# Altium PCB interface.PcbDoc (part 1 of 2)
Units mm, origin at the board's own origin, x right, y up, seen from the top; angles counter-clockwise.
Board outline 152.4 x 101.6 mm, 4 copper layers (Top Layer 1, Top Layer, Bottom Layer, Bottom Layer 1), stack 1.483 mm thick; 90 components, 76 nets, 332 pads, 20 vias.
Unrouted connection lines stored in the file: 69.
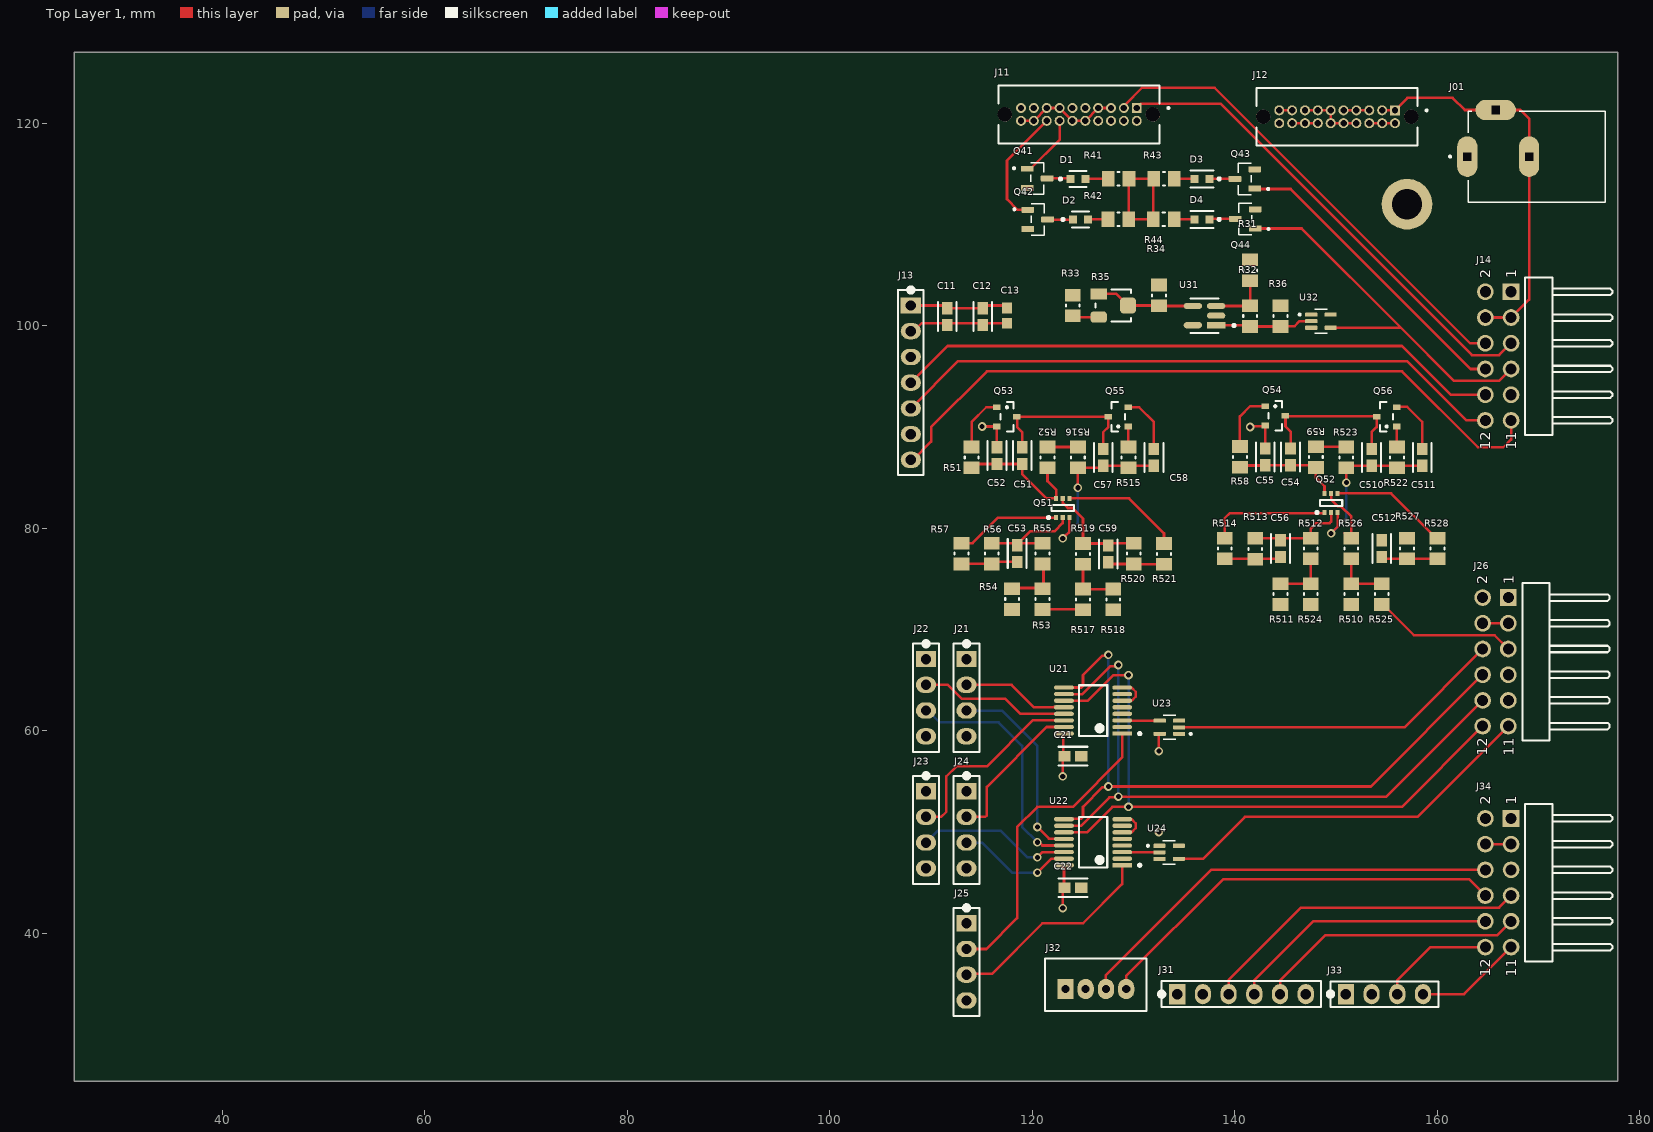
[diagram p0: Top Layer 1 view]
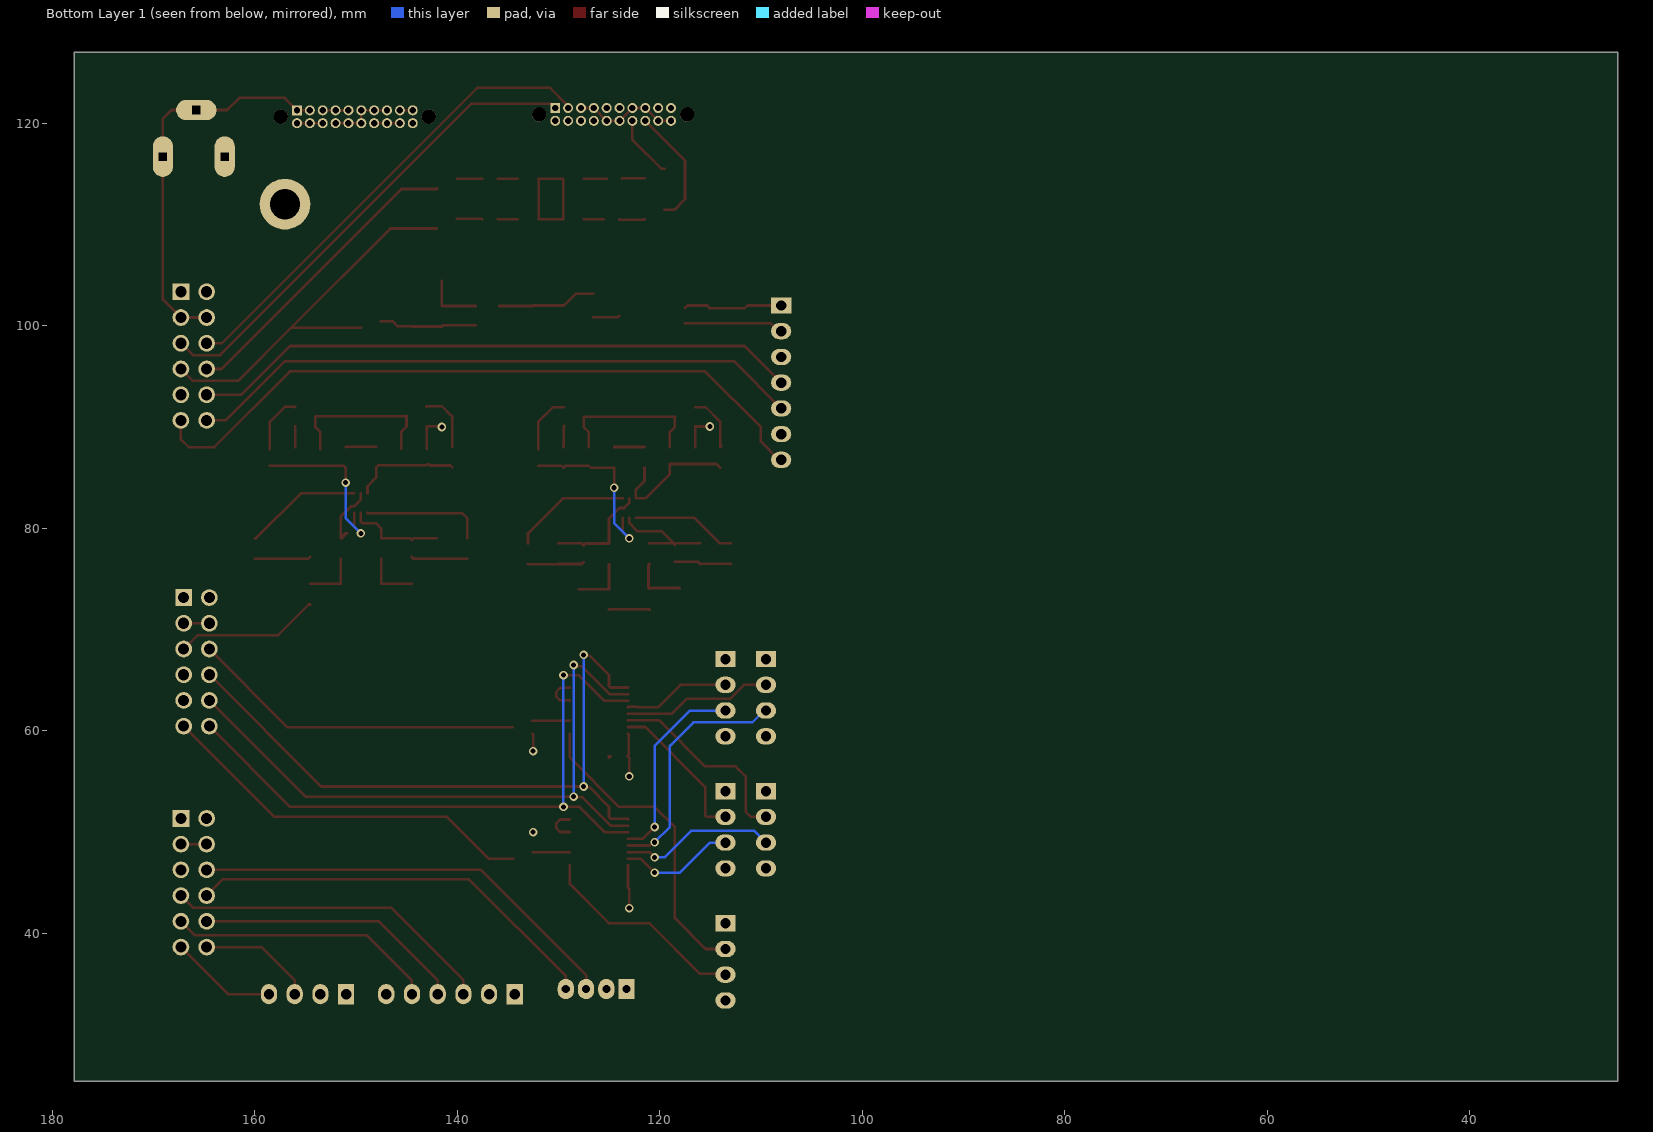
[diagram p1: Bottom Layer 1 view, seen from below]
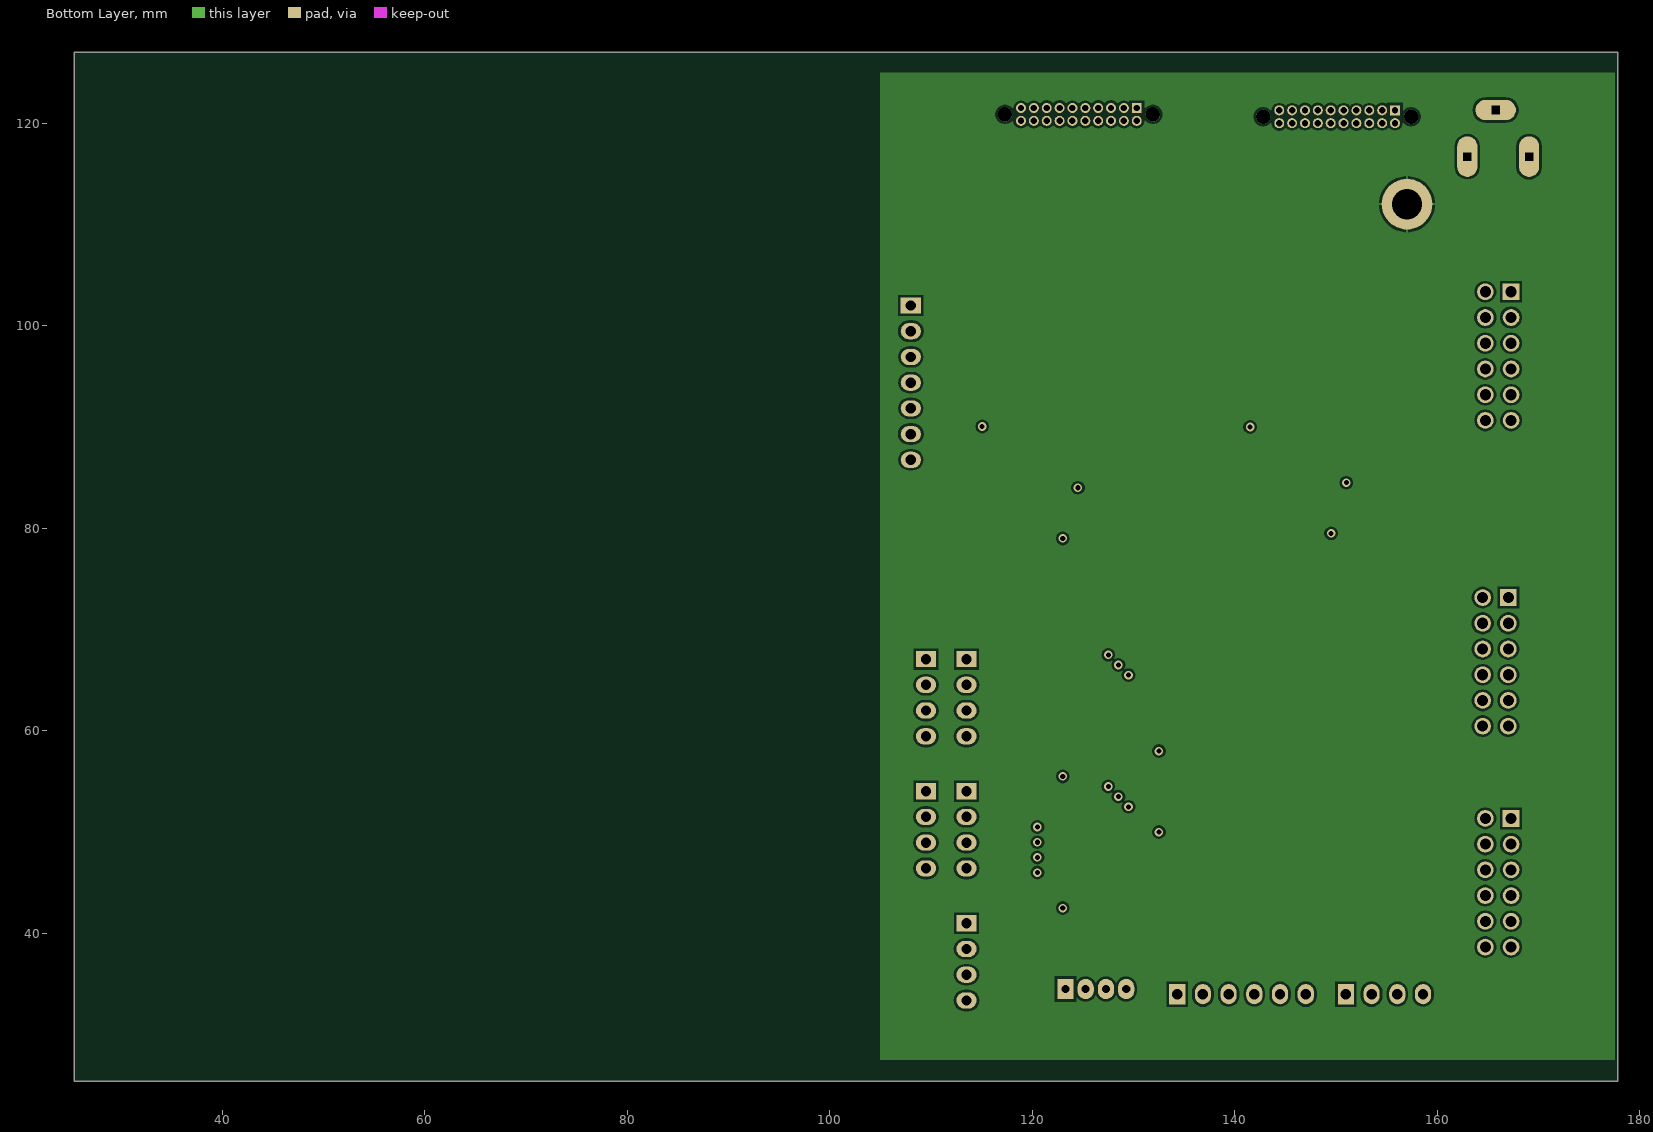
[diagram p2: Bottom Layer]

## Layer stack, top to bottom
Top Solder: solder mask 0.0102, Solder Resist, Dk 3.5
Top Layer 1: signal copper 0.035
Dielectric 2: prepreg 0.0711, PP-006, Dk 4.29
Top Layer: signal copper 0.0356
Dielectric 1: dielectric 1.2, FR-4, Dk 4.8
Bottom Layer: signal copper 0.0356
Dielectric 3: prepreg 0.0711, PP-006, Dk 4.29
Bottom Layer 1: signal copper 0.035
Bottom Solder: solder mask 0.0102, Solder Resist, Dk 3.5

## Board outline
25.4,25.4 177.8,25.4 177.8,127 25.4,127

## Design rules (kind name [scope] priority, off if disabled: settings)
Clearance [All] p1: gap=0.229 ignorepadtopadclearanceinfootprint=FALSE except(0: Arc-Hole Track-Hole SMDPad-Hole THPad-Hole Via-Hole Fill-Hole Poly-Hole Region-Hole Text-Hole)
PolygonConnect [All] p1: connectstyle=Relief reliefconductorwidth=0.254 reliefentries=4 polygonreliefangle="90 Angle" airgapwidth=0.254
RoutingVias [All] p1: holewidth=0.711 width=1.27 viastyle="Through Hole" minholewidth=0.711 minwidth=1.27 maxholewidth=0.711 maxwidth=1.27
SolderMaskExpansion [All] p1: expansion=0.102 istentingtop=FALSE
Width [All] p1: maxlimit=0.254 minlimit=0.254 preferedwidth=0.254
30 further rules are at their usual default settings.

## Components (designator, comment, footprint, x,y, rotation, side; value= is the part's Value field where it differs from the comment)
C11 "10nF" FP-C0603C-CF-IPC_A 111.599,100.9 r90 top
C12 "100nF" FP-C0603C104K5RAC3121-IPC_A 115.099,100.9 r90 top
C13 "1µF" CAPC1608X90X35NL15T15 117.5,101 r90 top
C21 "100nF" FP-C0603C104K5RAC3121-IPC_A 124,57.5 r180 top
C22 "100nF" FP-C0603C104K5RAC3121-IPC_A 124,44.5 r180 top
C51 "100nF" FP-C0603C104K5RAC3121-IPC_A 119,87.174 r90 top
C52 "100nF" FP-C0603C104K5RAC3121-IPC_A 116.5,87.174 r90 top
C53 "10nF" FP-C0603C-CF-IPC_A 118.5,77.5 r90 top
C54 "100nF" FP-C0603C104K5RAC3121-IPC_A 145.5,87.05 r90 top
C55 "100nF" FP-C0603C104K5RAC3121-IPC_A 143,87.05 r90 top
C56 "10nF" FP-C0603C-CF-IPC_A 144.5,78 r90 top
C57 "100nF" FP-C0603C104K5RAC3121-IPC_A 127,87 r90 top
C58 "100nF" FP-C0603C104K5RAC3121-IPC_A 132,87 r90 top
C59 "10nF" FP-C0603C-CF-IPC_A 127.5,77.475 r90 top
C510 "100nF" FP-C0603C104K5RAC3121-IPC_A 153.5,87 r90 top
C511 "100nF" FP-C0603C104K5RAC3121-IPC_A 158.5,87 r90 top
C512 "10nF" FP-C0603C-CF-IPC_A 154.5,78 r90 top
D1 "LTST-C193TGKT-5A" FP-LTST-C193TGKT-5A 124.5,114.5 r0 top
D2 "LTST-C193TBKT-5A" FP-LTST-C193TBKT-5A-MFG 124.75,110.5 r0 top
D3 "LTST-C190KFKT" FP-LTST-C190KFKT-MFG 136.75,114.5 r180 top
D4 "LTST-C191KRKT" FP-LTST-C191KRKT 136.75,110.5 r180 top
J01 "CON-SOCJ-2155" GRAVITECH_CON-SOCJ-2155 166,119 r180 top
J11 "Holo 32 conector" SAMTEC_TFM-110-21-S-D-A 124.595,120.865 r180 top
J12 "Holo 32 conector" SAMTEC_TFM-110-21-S-D-A 150.095,120.635 r180 top
J13 "1x7 Header" "header 1x7" 108,102 r0 top
J14 "61301221021" 61301221021 170,97 r90 top
J21 "1x4 Header" "header 1x4" 113.5,67.08 r0 top
J22 "1x4 Header" "header 1x4" 109.5,67.08 r0 top
J23 "1x4 Header" "header 1x4" 109.5,54.04 r0 top
J24 "1x4 Header" "header 1x4" 113.5,54.04 r0 top
J25 "1x4 Header" "header 1x4" 113.5,41 r0 top
J26 "61301221021" 61301221021 169.73,66.81 r90 top
J31 "1x6 Header" "header 1x6" 140.65,34 r90 top
J32 "1x4 Grove conector" FP-110990030 123.268,34.5 r90 top
J33 "1x4 Header" "header 1x4" 150.96,34 r90 top
J34 "61301221021" 61301221021 170,45 r90 top
Q41 "NXV55UNR" SOT95P230X110-3N 119.5,115.5 r0 top
Q42 "NXV55UNR" SOT95P230X110-3N 119.54,111.45 r0 top
Q43 "NXV55UNR" SOT95P230X110-3N 141.96,113.55 r180 top
Q44 "NXV55UNR" SOT95P230X110-3N 142,109.6 r180 top
Q51 "MBT3904DW1T1G" ONSC-SOT-363-6-419B-02_W_V 123,82 r90 top
Q52 "MBT3904DW1T1G" ONSC-SOT-363-6-419B-02_W_V 149.5,82.5 r90 top
Q53 "SI2304BDST1E3" FP-SI2304BDST1E3 116.5,91.95 r0 top
Q54 "SI2304BDST1E3" FP-SI2304BDST1E3 143,92.05 r0 top
Q55 "SI2304BDST1E3" FP-SI2304BDST1E3 129.468,90.05 r180 top
Q56 "SI2304BDST1E3" FP-SI2304BDST1E3 155.968,90.05 r180 top
R31 "10k" RESC2013X50X30ML20T20 141.5,105.475 r270 top
R32 "953k" RESC2013X50X30ML20T20 141.5,100.95 r270 top
R33 "680k" RESC2013X50X30ML20T20 124,102 r90 top
R34 "261k" RESC2013X50X30ML20T20 132.5,103 r270 top
R35 "3313J-2-104E" FP-3313J-2-104E 128,102 r0 top
R36 "100k" RESC2013X50X30ML20T20 144.5,100.95 r90 top
R41 "390" RESC2013X50X30ML20T20 128.525,114.5 r0 top
R42 "390" RESC2013X50X30ML20T20 128.5,110.5 r0 top
R43 "620" RESC2013X50X30ML20T20 133,114.5 r180 top
R44 "620" RESC2013X50X30ML20T20 132.975,110.5 r180 top
R51 "10k" RESC2013X50X30ML20T20 114,87 r90 top
R52 "100k" RESC2013X50X30ML20T20 121.5,87 r270 top
R53 "100k" RESC2013X50X30ML20T20 121,73 r270 top
R54 "100" RESC2013X50X30ML20T20 118,73 r90 top
R55 "10k" RESC2013X50X30ML20T20 121,77.5 r90 top
R56 "10k" RESC2013X50X30ML20T20 116,77.5 r90 top
R57 "8.2k" RESC2013X50X30ML20T20 113,77.5 r90 top
R58 "10k" RESC2013X50X30ML20T20 140.5,87.05 r90 top
R59 "100k" RESC2013X50X30ML20T20 148,87.025 r270 top
R510 "100k" RESC2013X50X30ML20T20 147.5,73.5 r270 top
R511 "100" RESC2013X50X30ML20T20 144.5,73.5 r90 top
R512 "10k" RESC2013X50X30ML20T20 147.5,78 r90 top
R513 "10k" RESC2013X50X30ML20T20 142,77.975 r90 top
R514 "8.2k" RESC2013X50X30ML20T20 139,78 r90 top
R515 "10k" RESC2013X50X30ML20T20 129.5,87 r90 top
R516 "100k" RESC2013X50X30ML20T20 124.5,87 r270 top
R517 "100k" RESC2013X50X30ML20T20 125,72.975 r270 top
R518 "100" RESC2013X50X30ML20T20 128,72.975 r90 top
R519 "10k" RESC2013X50X30ML20T20 125,77.475 r90 top
R520 "10k" RESC2013X50X30ML20T20 130,77.5 r90 top
R521 "8.2k" RESC2013X50X30ML20T20 133,77.475 r90 top
R522 "10k" RESC2013X50X30ML20T20 156,87 r90 top
R523 "100k" RESC2013X50X30ML20T20 151,87 r270 top
R524 "100k" RESC2013X50X30ML20T20 151.5,73.5 r270 top
R525 "100" RESC2013X50X30ML20T20 154.5,73.5 r90 top
R526 "10k" RESC2013X50X30ML20T20 151.5,78 r90 top
R527 "10k" RESC2013X50X30ML20T20 157,78 r90 top
R528 "8.2k" RESC2013X50X30ML20T20 160,78 r90 top
U21 "TMUX1308PWR" FP-PW0016A-IPC_A 126,62 r180 top
U22 "TMUX1308PWR" FP-PW0016A-IPC_A 126,49 r180 top
U23 "SN74LV1T04DCKRG4" SOT65P210X110-5N 133.54,60.35 r180 top
U24 "SN74LV1T04DCKRG4" SOT65P210X110-5N 133.5,48 r0 top
U31 "OPA607QDBVRQ1" FP-DBV0005A-IPC_A 137,101 r180 top
U32 "SN74LV1T04DCKRG4" SOT65P210X110-5N 148.5,100.45 r0 top

## Footprints (in the part's own frame and the unit in brackets; to place one, negate y for a bottom-side part, rotate by r counter-clockwise, add the part's x,y. Pads: shape width x height; smd on the part's side, far side on the other; paste and mask are expansions set on the pad)
61301221021 [mm] "Pin Header, pitch 2.54 mm, THT, Angled, dual row, 12p"
  rect 1.65x1.65 hole 1.1: 1(6.35,2.73)
  round 1.65 hole 1.1: 2(6.35,5.27) 3(3.81,2.73) 4(3.81,5.27) 5(1.27,2.73) 6(1.27,5.27) 7(-1.27,2.73) 8(-1.27,5.27) 9(-3.81,2.73) 10(-3.81,5.27) 11(-6.35,2.73) 12(-6.35,5.27)
  silkscreen extent -7.77,-7.27 7.77,1.35, body extent -7.62,-7.27 7.62,5.63, height 5.12
CAPC1608X90X35NL15T15 [mm] "Chip Capacitor, 2-Leads, Body 1.60x0.81mm, IPC Medium Density"
  rect 1.05x1 smd: 1(-0.75,0) 2(0.75,0)
  body extent -0.88,-0.48 0.87,0.48, height 0.9
FP-3313J-2-104E [mm]
  rect 1.6x1.1 smd: 1(-1.45,1.15)
  rrect50% 1.6x1.1 smd: 2(-1.45,-1.15)
  rrect50% 1.6x1.6 smd: 3(1.45,0)
  silkscreen extent -1.75,-1.6 1.75,1.6
FP-110990030 [mm]
  rect 2x1.6 hole 0.8: 1(0,0)
  oval 2x1.6 hole 0.8: 2(0,-2) 3(0,-4) 4(0,-6)
  silkscreen extent -2.17,-8 3,2, body extent -2.15,-8 2.95,2, height 8.11
FP-C0603C104K5RAC3121-IPC_A [mil]
  rect 47.5x41.66 smd paste+0 mask+0: 1(-32.51,0) 2(32.51,0)
  silkscreen extent -56,-37 56,37, body extent -76,-41 76,41, height 10
FP-C0603C-CF-IPC_A [mil]
  rect 47.5x41.66 smd paste+0 mask+0: 1(-32.51,0) 2(32.51,0)
  silkscreen extent -56,-37 56,37, body extent -76,-41 76,41, height 10
FP-DBV0005A-IPC_A [mm]
  rect 1.805x0.612 smd paste+0 mask+0: 1(-1.15,0.95)
  rrect100% 1.805x0.612 smd paste+0 mask+0: 2(-1.15,0) 3(-1.15,-0.95) 4(1.15,-0.95) 5(1.15,0.95)
  silkscreen extent -3.03,-1.7 1.4,1.7, body extent -2.55,-1.95 2.55,1.95, height 0.25
FP-LTST-C190KFKT-MFG [mm]
  rect 0.8x0.8 smd paste+0 mask+0: 1(-0.75,0) 2(0.75,0)
  silkscreen extent -1.83,-0.85 1.15,0.85, body extent -1.25,-0.55 1.25,0.55, height 0.25
FP-LTST-C191KRKT [mm]
  rect 0.8x0.8 smd paste+0 mask+0: 1(-0.75,0) 2(0.75,0)
  silkscreen extent -1.83,-0.85 1.15,0.85, body extent -0.8,-0.4 0.8,0.4, height 0.81
FP-LTST-C193TBKT-5A-MFG [mm]
  rect 0.8x0.8 smd paste+0 mask+0: 1(-0.75,0) 2(0.75,0)
  silkscreen extent -1.85,-0.8 0.85,0.8, body extent -1.25,-0.55 1.25,0.55, height 0.25
FP-LTST-C193TGKT-5A [mm]
  rect 0.8x0.8 smd paste+0 mask+0: 1(-0.75,0) 2(0.75,0)
  silkscreen extent -1.85,-0.8 0.85,0.8, body extent -1.25,-0.55 1.25,0.55, height 0.25
FP-PW0016A-IPC_A [mm]
  rect 1.955x0.421 smd paste+0 mask+0: 1(-2.875,2.275)
  rrect100% 1.955x0.421 smd paste+0 mask+0: 2(-2.875,1.625) 3(-2.875,0.975) 4(-2.875,0.325) 5(-2.875,-0.325) 6(-2.875,-0.975) 7(-2.875,-1.625) 8(-2.875,-2.275) 9(2.875,-2.275) 10(2.875,-1.625) 11(2.875,-0.975) 12(2.875,-0.325) 13(2.875,0.325) 14(2.875,0.975) 15(2.875,1.625) 16(2.875,2.275)
  silkscreen extent -4.73,-2.5 1.4,2.5, body extent -4.35,-3 4.35,3, height 0.25
FP-SI2304BDST1E3 [mm]
  rect 0.724x0.559 smd: 1(0,0) 2(0,-1.9) 3(1.968,-0.95)
  silkscreen extent 0.33,-2.4 1.63,0.5
GRAVITECH_CON-SOCJ-2155 [mm]
  oval 2x4 hole 0.8 square: 1(3.05,2.3) 3(-3.05,2.3)
  oval 4x2 hole 0.8 square: 2(0.25,-2.3)
  silkscreen extent -10.55,-2.2 4.85,6.8, body extent -10.55,-2.45 3.55,6.8, height 11.1
"header 1x4" [mm]
  rect 2x1.6 hole 1.02: 1(0,0)
  oval 2x1.6 hole 1.02: 2(0,-2.54) 3(0,-5.08) 4(0,-7.62)
  silkscreen extent -1.27,-9.15 1.27,1.72
"header 1x6" [mm]
  rect 2x1.6 hole 1.02: 1(0,6.35)
  oval 2x1.6 hole 1.02: 2(0,3.81) 3(0,1.27) 4(0,-1.27) 5(0,-3.81) 6(0,-6.35)
  silkscreen extent -1.28,-7.88 1.28,8.08
"header 1x7" [mm]
  rect 2x1.6 hole 1.02: 1(0,0)
  oval 2x1.6 hole 1.02: 2(0,-2.54) 3(0,-5.08) 4(0,-7.62) 5(0,-10.16) 6(0,-12.7) 7(0,-15.24)
  silkscreen extent -1.28,-16.75 1.28,1.73
ONSC-SOT-363-6-419B-02_W_V [mm] "SOT23, 6-Leads, Body 2x1.25mm, Pitch 0.65mm"
  rect 0.5x0.4 smd: 1(-0.95,0.65) 2(-0.95,0) 3(-0.95,-0.65) 4(0.95,-0.65) 5(0.95,0) 6(0.95,0.65)
  silkscreen extent -1.07,-1.1 0.3,1.52, body extent -0.63,-1 0.63,1, height 1.1
RESC2013X50X30ML20T20 [mm] "Chip Resistor, 2-Leads, Body 2.00x1.25mm, IPC Low Density"
  rect 1.25x1.55 smd: 1(-1.025,0) 2(1.025,0)
  silkscreen extent -0.1,-0.67 0.1,0.67, body extent -1.1,-0.72 1.1,0.72, height 0.5
SAMTEC_TFM-110-21-S-D-A [mm]
  rect 0.985x0.985 hole 0.635: 1(-5.715,-0.635)
  round 0.985 hole 0.635: 2(-5.715,0.635) 3(-4.445,-0.635) 4(-4.445,0.635) 5(-3.175,-0.635) 6(-3.175,0.635) 7(-1.905,-0.635) 8(-1.905,0.635) 9(-0.635,-0.635) 10(-0.635,0.635) 11(0.635,-0.635) 12(0.635,0.635) 13(1.905,-0.635) 14(1.905,0.635) 15(3.175,-0.635) 16(3.175,0.635) 17(4.445,-0.635) 18(4.445,0.635) 19(5.715,-0.635) 20(5.715,0.635)
  round 1.42 hole 1.42 unplated: ""(-7.305,0) ""(7.305,0)
  silkscreen extent -8.94,-2.86 7.94,2.86
SOT65P210X110-5N [mm]
  rrect25% 1.19x0.4 smd: 1(-0.96,0.65) 2(-0.96,0) 3(-0.96,-0.65) 4(0.96,-0.65) 5(0.96,0.65)
  silkscreen extent -2.2,-1.17 0.63,1.17, body extent -1.05,-1 1.05,1, height 1.1
SOT95P230X110-3N [mm]
  rrect25% 1.26x0.59 smd: 1(0,0) 2(0,-1.9) 3(1.96,-0.95)
  silkscreen extent -1.42,-2.51 1.63,0.61, body extent -0.17,-2.4 2.13,0.5, height 1.11

## Part data
C11 C53 C56 C59 C512: library part C0603C103K5RACTU, "CAP CER 10000PF 50V X7R 0603", Case Code (Imperial)=0603, Case Code (Metric)=1608, Dielectric=X7R, Dielectric Material=Ceramic, Manufacturer=KEMET, Max Operating Temperature=125°C, Min Operating Temperature=-55°C, Package Quantity=4000, Tolerance=10%, Voltage=50V, Capacitance=10nF, Case/Package=0603, Category="Ceramic Capacitors", ComponentLink1Description=https://datasheet.ciiva.com/7823/1732718-7823585.pdf?src-supplier=Element14, ComponentLink1URL=https://datasheet.ciiva.com/7823/1732718-7823585.pdf?src-supplier=Element14, ComponentLink2Description=https://datasheet.ciiva.com/5904/kem-c1002-x7r-smd-5904645.pdf?src-supplier=Farnell, ComponentLink2URL=https://datasheet.ciiva.com/5904/kem-c1002-x7r-smd-5904645.pdf?src-supplier=Farnell, ComponentLink3Description=https://datasheet.ciiva.com/7823/kem-c1002-x7r-smd-7823976.pdf?src-supplier=Element14, ComponentLink3URL=https://datasheet.ciiva.com/7823/kem-c1002-x7r-smd-7823976.pdf?src-supplier=Element14, ComponentLink4Description=https://datasheet.ciiva.com/7823/1918693-7823978.pdf?src-supplier=Element14, ComponentLink4URL=https://datasheet.ciiva.com/7823/1918693-7823978.pdf?src-supplier=Element14, ComponentLink5Description=https://datasheet.ciiva.com/28645/1851736-28645598.pdf?src-supplier=Element14, ComponentLink5URL=https://datasheet.ciiva.com/28645/1851736-28645598.pdf?src-supplier=Element14, ComponentLink6Description=https://datasheet.ciiva.com/7823/kem-c1002-x7r-smd-7823977.pdf?src-supplier=Element14, ComponentLink6URL=https://datasheet.ciiva.com/7823/kem-c1002-x7r-smd-7823977.pdf?src-supplier=Element14, ComponentLink7Description=https://datasheet.ciiva.com/14585/70095383-14585450.pdf?src-supplier=Allied+Electronics, ComponentLink7URL=https://datasheet.ciiva.com/14585/70095383-14585450.pdf?src-supplier=Allied+Electronics, ComponentLink8Description=https://datasheet.ciiva.com/5416/kem-c1002-x7r-smd-5416028.pdf?src-supplier=Mouser, ComponentLink8URL=https://datasheet.ciiva.com/5416/kem-c1002-x7r-smd-5416028.pdf?src-supplier=Mouser, ComponentLink9Description=https://datasheet.ciiva.com/39122/kem-c1002-x7r-smd-39122903.pdf?src-supplier=Onlinecomponents.com, ComponentLink9URL=https://datasheet.ciiva.com/39122/kem-c1002-x7r-smd-39122903.pdf?src-supplier=Onlinecomponents.com, ComponentLink10Description=https://datasheet.ciiva.com/18192/getdatasheetpartid-308803-18192662.pdf?src-supplier=Verical, ComponentLink10URL=https://datasheet.ciiva.com/18192/getdatasheetpartid-308803-18192662.pdf?src-supplier=Verical, ComponentLink11Description=https://datasheet.ciiva.com/18101/getdatasheetpartid-58468-18101898.pdf?src-supplier=Verical, ComponentLink11URL=https://datasheet.ciiva.com/18101/getdatasheetpartid-58468-18101898.pdf?src-supplier=Verical, Construction=Flat, Contact Plating=Tin,Matte, Depth=0.8mm, Dissipation Factor=2.5%, Height=0.8mm, Lead Pitch=0.7mm, Length=1.6mm, Manufacturer Part Number=C0603C103K5RACTU, Mount="Surface Mount,PCB", Number of Pins=2, Packaging="Tape and Reel", Pricing 1="1=0,16000, 10=0,07400, 50=0,07400, 100=0,03300, 500=0,02400, 1000=0,01900, 2000=0,01700, 4000=0,01500, 8000=0,01300, 10000=0,01300 (USD)", Radiation Hardening=No, REACH SVHC="No SVHC", RoHS=Yes, RoHS Compliant=Yes, Series=C0603C, Stock 1=1844699, Supplier 1=Mouser, Termination=SMD/SMT, Thickness=0.034inch, Voltage Rating=50V, Voltage Rating (DC)=50V, Width=0.8mm
C12 C21 C22 C51 C52 C54 C55 C57 C58 C510 C511: library part C0603C104K5RAC3121, "Cap Ceramic 0.1uF 50V X7R 10% Pad SMD 0603 125°C T/R", Case/Package=0603, Manufacturer=KEMET, Category="Ceramic Capacitors", Manufacturer Part Number=C0603C104K5RAC3121, Pricing 1="1=0,13000, 10=0,09200, 50=0,09200, 100=0,04300, 1000=0,02500, 10000=0,01900 (USD)", RoHS=Yes, RoHS Compliant=Yes, Stock 1=3306727, Supplier 1=Mouser
C13: library part C0603C105K4RACTU, "Cap Ceramic 1uF 16V X7R 10% SMD 0603 125°C Paper T/R", Capacitance=1uF, Case Code (Imperial)=0603, Case Code (Metric)=1608, Dielectric=X7R, Dielectric Material=Ceramic, Manufacturer=KEMET, Max Operating Temperature=125°C, Min Operating Temperature=-55°C, Package Quantity=4000, Tolerance=10%, Voltage=16V, Case/Package=0603, Category="Ceramic Capacitors", ComponentLink1Description=https://datasheet.ciiva.com/7823/kem-c1002-x7r-smd-7823997.pdf?src-supplier=Element14, ComponentLink1URL=https://datasheet.ciiva.com/7823/kem-c1002-x7r-smd-7823997.pdf?src-supplier=Element14, ComponentLink2Description=https://datasheet.ciiva.com/22749/kem-c1002-x7r-smd-22749721.pdf?src-supplier=Element14, ComponentLink2URL=https://datasheet.ciiva.com/22749/kem-c1002-x7r-smd-22749721.pdf?src-supplier=Element14, ComponentLink3Description=https://datasheet.ciiva.com/5419/kem-c1002-x7r-smd-5419750.pdf?src-supplier=Mouser, ComponentLink3URL=https://datasheet.ciiva.com/5419/kem-c1002-x7r-smd-5419750.pdf?src-supplier=Mouser, ComponentLink4Description=https://datasheet.ciiva.com/18192/getdatasheetpartid-385479-18192732.pdf?src-supplier=Verical, ComponentLink4URL=https://datasheet.ciiva.com/18192/getdatasheetpartid-385479-18192732.pdf?src-supplier=Verical, Construction=Flat, Contact Plating=Tin,Matte, Depth=0.8mm, Dissipation Factor=3.5%, Height=0.8mm, Length=1.6mm, Manufacturer Part Number=C0603C105K4RACTU, Mount="Surface Mount,PCB", Number of Pins=2, Packaging="Tape and Reel", Pricing 1="1=0,17000, 10=0,08000, 50=0,08000, 100=0,03600, 500=0,02600, 1000=0,02000, 2000=0,01900, 4000=0,01600, 8000=0,01400, 10000=0,01400 (USD)", Radiation Hardening=No, REACH SVHC="No SVHC", RoHS=Yes, RoHS Compliant=Yes, Series=C0603C, Stock 1=3280807, Supplier 1=Mouser, Termination=SMD/SMT, Thickness=0.034inch, Voltage Rating=16V, Voltage Rating (DC)=16V, Width=0.031inch
D1: "0603(H=0.35mm) 绿色 λD=520nm~535nm VR=5V VF=2.5V~3.1V IF=5mA PD=76mW", Case Code (Imperial)=0603, Case Code (Metric)=1608, Color=Green, Forward Current=5mA, Forward Voltage=3.1V, Lens Color=Colorless, Manufacturer="Vishay Lite-On", Max Operating Temperature=80°C, Min Operating Temperature=-20°C, Package Quantity=3000, Power Dissipation=76mW, Reverse Voltage=5V, Supplier Part Number 1=859-LTSTC193TGKT5A, Case/Package=0603, Category=LEDs, ComponentLink1Description=https://datasheet.ciiva.com/2111/ltst-c193tgkt-5a-2111818.pdf?src-supplier=Digi-Key, ComponentLink1URL=https://datasheet.ciiva.com/2111/ltst-c193tgkt-5a-2111818.pdf?src-supplier=Digi-Key, ComponentLink2Description=https://datasheet.ciiva.com/11775/0900766b80dc0555-11775617.pdf?src-supplier=RSComponents, ComponentLink2URL=https://datasheet.ciiva.com/11775/0900766b80dc0555-11775617.pdf?src-supplier=RSComponents, ComponentLink3Description=https://datasheet.ciiva.com/4689/lite-on-ltst-c193tgkt-5a-187259-4689610.pdf?src-supplier=Mouser, ComponentLink3URL=https://datasheet.ciiva.com/4689/lite-on-ltst-c193tgkt-5a-187259-4689610.pdf?src-supplier=Mouser, ComponentLink4Description=https://datasheet.ciiva.com/2111/p-100-ltst-c193tgkt-5a-2111819.pdf?src-supplier=Digi-Key, ComponentLink4URL=https://datasheet.ciiva.com/2111/p-100-ltst-c193tgkt-5a-2111819.pdf?src-supplier=Digi-Key, ComponentLink5Description=https://datasheet.ciiva.com/2111/p-100-ltst-c193tgkt-5a-2111820.pdf?src-supplier=Digi-Key, ComponentLink5URL=https://datasheet.ciiva.com/2111/p-100-ltst-c193tgkt-5a-2111820.pdf?src-supplier=Digi-Key, Depth=0.8mm, Dominant Wavelength=535nm, Height=0.35mm, Illumination Color=Green, Lead Free="Lead Free", Length=1.6mm, Lens Style=Diffused,Colorless,Rectangular, Lens Transparency=Clear, Luminous Intensity=280mcd, Manufacturer Part Number=LTST-C193TGKT-5A, Mount="Surface Mount", Number of Elements=1, Number of LEDs=1, Number of Pins=2, Packaging="Tape and Reel", Pricing 1="1=0,44000, 10=0,27500, 50=0,27500, 100=0,15800, 1000=0,12400, 5000=0,11300, 10000=0,09600, 25000=0,09200, 50000=0,08900 (USD)", Radiation Hardening=No, RoHS=Yes, RoHS Compliant=Yes, Series=-, Stock 1=78292, Supplier 1=Mouser, Test Current=5mA, Viewing Angle=130°, Width=0.8mm
D2: "0603(H=0.35mm) 蓝色 λD=465nm~475nm VR=5V VF=2.65V~3.05V IF=5mA PD=76mW", Case Code (Imperial)=0603, Case Code (Metric)=1608, Color=Blue, Forward Current=20mA, Forward Voltage=2.8V, Lens Color=Colorless, Manufacturer="Vishay Lite-On", Max Operating Temperature=80°C, Min Operating Temperature=-20°C, Package Quantity=1, Power Dissipation=76mW, Reverse Voltage=5V, Supplier Part Number 1=859-LTSTC193TBKT5A, Test Current=5mA, Case/Package=0603, Category=LEDs, ComponentLink1Description=https://datasheet.ciiva.com/2111/ltst-c193tbkt-5a-2111219.pdf?src-supplier=Digi-Key, ComponentLink1URL=https://datasheet.ciiva.com/2111/ltst-c193tbkt-5a-2111219.pdf?src-supplier=Digi-Key, ComponentLink2Description=https://datasheet.ciiva.com/11773/0900766b80dc0554-11773880.pdf?src-supplier=RSComponents, ComponentLink2URL=https://datasheet.ciiva.com/11773/0900766b80dc0554-11773880.pdf?src-supplier=RSComponents, ComponentLink3Description=https://datasheet.ciiva.com/4688/lite-on-ltst-c193tbkt-5a-187386-4688832.pdf?src-supplier=Mouser, ComponentLink3URL=https://datasheet.ciiva.com/4688/lite-on-ltst-c193tbkt-5a-187386-4688832.pdf?src-supplier=Mouser, ComponentLink4Description=https://datasheet.ciiva.com/16210/ltst-c193tbkt-5a-16210824.pdf?src-supplier=Future+Electronics, ComponentLink4URL=https://datasheet.ciiva.com/16210/ltst-c193tbkt-5a-16210824.pdf?src-supplier=Future+Electronics, ComponentLink5Description=https://datasheet.ciiva.com/15201/getdatasheetpartid-293056-15201395.pdf?src-supplier=Verical, ComponentLink5URL=https://datasheet.ciiva.com/15201/getdatasheetpartid-293056-15201395.pdf?src-supplier=Verical, ComponentLink6Description=https://datasheet.ciiva.com/2111/p-100-ltst-c193tbkt-5a-2111220.pdf?src-supplier=Digi-Key, ComponentLink6URL=https://datasheet.ciiva.com/2111/p-100-ltst-c193tbkt-5a-2111220.pdf?src-supplier=Digi-Key, ComponentLink7Description=https://datasheet.ciiva.com/2111/p-100-ltst-c193tbkt-5a-2111221.pdf?src-supplier=Digi-Key, ComponentLink7URL=https://datasheet.ciiva.com/2111/p-100-ltst-c193tbkt-5a-2111221.pdf?src-supplier=Digi-Key, Depth=0.8mm, Dominant Wavelength=475nm, Height=0.35mm, Illumination Color=Blue, Lead Free="Lead Free", Length=1.6mm, Lens Style=Diffused,Colorless,Rectangular,Clear, Lens Transparency=Clear, Luminous Intensity=15mcd, Manufacturer Part Number=LTST-C193TBKT-5A, Mount="Surface Mount", Number of Elements=1, Number of LEDs=1, Number of Pins=2, Packaging="Tape and Reel", Pricing 1="1=0,30000, 10=0,23400, 50=0,23400, 100=0,10600, 500=0,09500, 1000=0,07800, 5000=0,06700, 10000=0,05400, 25000=0,05000, 50000=0,04500 (USD)", Radiation Hardening=No, RoHS=Yes, RoHS Compliant=Yes, Stock 1=327691, Supplier 1=Mouser, Viewing Angle=130°, Width=0.8mm
D3: "0603(H=0.9mm) 橙色 λD=605nm VR=5V VF=2.0V~2.4V IF=20mA PD=75mW", Case Code (Imperial)=0603, Case Code (Metric)=1608, Color=Orange, Forward Current=30mA, Forward Voltage=2V, Lens Color=Colorless, Manufacturer="Vishay Lite-On", Max Operating Temperature=85°C, Min Operating Temperature=-55°C, Package Quantity=1, Power Dissipation=75mW, Reverse Voltage=5V, Supplier Part Number 1=859-LTST-C190KFKT, Test Current=20mA, Case/Package=0603, Category=LEDs, ComponentLink1Description=https://datasheet.ciiva.com/11774/0900766b80dc02a7-11774744.pdf?src-supplier=RSComponents, ComponentLink1URL=https://datasheet.ciiva.com/11774/0900766b80dc02a7-11774744.pdf?src-supplier=RSComponents, ComponentLink2Description=https://datasheet.ciiva.com/12400/100-ltst-c190kfkt-53640-12400769.pdf?src-supplier=Mouser, ComponentLink2URL=https://datasheet.ciiva.com/12400/100-ltst-c190kfkt-53640-12400769.pdf?src-supplier=Mouser, ComponentLink3Description=https://datasheet.ciiva.com/16396/lite-on20ltst-c190kfkt-16396246.pdf?src-supplier=Future+Electronics, ComponentLink3URL=https://datasheet.ciiva.com/16396/lite-on20ltst-c190kfkt-16396246.pdf?src-supplier=Future+Electronics, ComponentLink4Description=https://datasheet.ciiva.com/15201/getdatasheetpartid-309341-15201388.pdf?src-supplier=Verical, ComponentLink4URL=https://datasheet.ciiva.com/15201/getdatasheetpartid-309341-15201388.pdf?src-supplier=Verical, ComponentLink5Description=https://datasheet.ciiva.com/2109/s-110-ltst-c190kfkt-2109977.pdf?src-supplier=Digi-Key, ComponentLink5URL=https://datasheet.ciiva.com/2109/s-110-ltst-c190kfkt-2109977.pdf?src-supplier=Digi-Key, ComponentLink6Description=https://datasheet.ciiva.com/2109/s-110-ltst-c190kfkt-2109976.pdf?src-supplier=Digi-Key, ComponentLink6URL=https://datasheet.ciiva.com/2109/s-110-ltst-c190kfkt-2109976.pdf?src-supplier=Digi-Key, ComponentLink7Description=https://datasheet.ciiva.com/2109/s-110-ltst-c190kfkt-2109978.pdf?src-supplier=Digi-Key, ComponentLink7URL=https://datasheet.ciiva.com/2109/s-110-ltst-c190kfkt-2109978.pdf?src-supplier=Digi-Key, Depth=1.6mm, Dominant Wavelength=605nm, Height=0.8mm, Illumination Color=Orange, Lead Free="Lead Free", Length=3.2mm, Lens Style=Diffused,Colorless,Clear,Rectangular, Lens Transparency=Clear, Luminous Intensity=90mcd, Manufacturer Part Number=LTST-C190KFKT, Mount="Surface Mount", Number of Elements=1, Number of LEDs=1, Number of Pins=2, Packaging="Tape and Reel", Power Rating=75mW, Pricing 1="1=0,22000, 10=0,12300, 50=0,12300, 100=0,05700, 500=0,05300, 1000=0,04200, 4000=0,04000, 8000=0,03100, 10000=0,03100, 24000=0,02800, 48000=0,02500 (USD)", Radiation Hardening=No, RoHS=Yes, RoHS Compliant=Yes, Stock 1=88067, Supplier 1=Mouser, Viewing Angle=130°, Wavelength=611nm, Width=0.8mm
D4: "0603(H=0.65mm) 红色 λD=631nm VR=5V VF=2.0V~2.4V IF=20mA PD=75mW", Case Code (Imperial)=0603, Case Code (Metric)=1608, Color=Red, Forward Current=30mA, Forward Voltage=2V, Lens Color=Colorless, Manufacturer="Vishay Lite-On", Max Operating Temperature=85°C, Min Operating Temperature=-55°C, Package Quantity=1, Power Dissipation=75mW, Reverse Voltage=5V, Supplier Part Number 1=859-LTST-C191KRKT, Test Current=20mA, Case/Package=0603, Category=LEDs, ComponentLink1Description=https://datasheet.ciiva.com/11773/0900766b80dc02b2-11773601.pdf?src-supplier=RSComponents, ComponentLink1URL=https://datasheet.ciiva.com/11773/0900766b80dc02b2-11773601.pdf?src-supplier=RSComponents, ComponentLink2Description=https://datasheet.ciiva.com/12400/lite-on-ltst-c191krkt-190135-12400910.pdf?src-supplier=Mouser, ComponentLink2URL=https://datasheet.ciiva.com/12400/lite-on-ltst-c191krkt-190135-12400910.pdf?src-supplier=Mouser, ComponentLink3Description=https://datasheet.ciiva.com/16212/ltst-c191krkt-16212419.pdf?src-supplier=Future+Electronics, ComponentLink3URL=https://datasheet.ciiva.com/16212/ltst-c191krkt-16212419.pdf?src-supplier=Future+Electronics, ComponentLink4Description=https://datasheet.ciiva.com/15117/getdatasheetpartid-141922-15117737.pdf?src-supplier=Verical, ComponentLink4URL=https://datasheet.ciiva.com/15117/getdatasheetpartid-141922-15117737.pdf?src-supplier=Verical, ComponentLink5Description=https://datasheet.ciiva.com/2109/s-110-ltst-c191krkt-2109971.pdf?src-supplier=Digi-Key, ComponentLink5URL=https://datasheet.ciiva.com/2109/s-110-ltst-c191krkt-2109971.pdf?src-supplier=Digi-Key, ComponentLink6Description=https://datasheet.ciiva.com/2109/s-110-ltst-c191krkt-2109970.pdf?src-supplier=Digi-Key, ComponentLink6URL=https://datasheet.ciiva.com/2109/s-110-ltst-c191krkt-2109970.pdf?src-supplier=Digi-Key, ComponentLink7Description=https://datasheet.ciiva.com/2109/s-110-ltst-c191krkt-2109972.pdf?src-supplier=Digi-Key, ComponentLink7URL=https://datasheet.ciiva.com/2109/s-110-ltst-c191krkt-2109972.pdf?src-supplier=Digi-Key, Depth=0.8mm, Dominant Wavelength=631nm, Height=0.55mm, Illumination Color=Red, Lead Free="Lead Free", Length=1.6mm, Lens Style=Clear,Diffused,Colorless,Rectangular, Lens Transparency=Clear, Luminous Intensity=54mcd, Manufacturer Part Number=LTST-C191KRKT, Mount="Surface Mount", Number of Elements=1, Number of LEDs=1, Number of Pins=2, Packaging="Tape and Reel", Power Rating=75mW, Pricing 1="1=0,26000, 10=0,14200, 50=0,14200, 100=0,06600, 500=0,06100, 1000=0,04800, 5000=0,04600, 10000=0,03600, 25000=0,03200, 50000=0,02900 (USD)", Radiation Hardening=No, RoHS=Yes, RoHS Compliant=Yes, Stock 1=594160, Supplier 1=Mouser, Viewing Angle=130°, Voltage=2V, Wavelength=639nm, Width=0.8mm
J01: "DC Power Connectors Power Jack/Connector 2.1mm x 5.5mm", Color=Black, Manufacturer=Gravitech, Supplier Part Number 1=992-CON-SOCJ-2155, Category=Uncategorized, ComponentLink1Description=http://www.gravitech.us/poja2x51.html?src-supplier=Mouser, ComponentLink1URL=http://www.gravitech.us/poja2x51.html?src-supplier=Mouser, Connector Type=Power, Contact Gender=Female, Manufacturer Part Number=CON-SOCJ-2155, Pricing 1="1=1,00000, 10=1,00000, 50=1,00000, 100=1,00000, 1000=1,00000, 10000=1,00000 (USD)", RoHS=Yes, Stock 1=14426, Supplier 1=Mouser
J11 J12: library part TFM-110-21-S-D-A, "Headers & Wire Housings High-Reliability Tiger Eye Terminal Strips, .050 Pitch", Housing Color=Black, Manufacturer=Samtec, Max Current Rating=5A, Max Operating Temperature=125°C, Max Voltage Rating (AC)=350V, Min Operating Temperature=-55°C, Supplier Part Number 1=TFM-110-21-S-D-A-ND, Category=Connectors, ComponentLink1Description=http://www.farnell.com/datasheets/2047776.pdf?src-supplier=Farnell, ComponentLink1URL=http://www.farnell.com/datasheets/2047776.pdf?src-supplier=Farnell, ComponentLink2Description=http://components.arrow.com/part/dataview/2691576S7516801N1004?src-supplier=Arrow+Electronics, ComponentLink2URL=http://components.arrow.com/part/dataview/2691576S7516801N1004?src-supplier=Arrow+Electronics, ComponentLink3Description=http://www.samtec.com/documents/webfiles/pdf/TFM_SM.PDF?src-supplier=Avnet, ComponentLink3URL=http://www.samtec.com/documents/webfiles/pdf/TFM_SM.PDF?src-supplier=Avnet, Contact Material=Bronze, Contact Plating=Gold, Depth=5.72mm, Gender=Male, Housing Material=Polymer, Length=15.88mm, Manufacturer Part Number=TFM-110-21-S-D-A, Number of Contacts=20, Number of Rows=2, Orientation=Straight, Packaging=Rail/Tube, Pitch=1.27mm, Pricing 1="1=8,39000, 35=7,16771, 105=6,64333, 455=5,59440, 945=4,89510 (USD)", REACH SVHC="No SVHC", RoHS=Yes, RoHS Compliant=Yes, Stock 1=45, Supplier 1=Digi-Key, Termination=Solder
J13: library part PPTC071LFBN-RC, "Female, 7C, Straight, .100\"CC; 3.20mm Tail, No Mt. 100u\" Tin; PBT, Phos Bronze, 105 C", Color=Black, Manufacturer=Sullins, Package Quantity=1000, Supplier Part Number 1=S7005-ND, Category=Connectors, ComponentLink1Description=https://media.digikey.com/pdf/Data%20Sheets/Sullins%20PDFs/Female_Headers.100_DS.pdf?src-supplier=Digi-Key, ComponentLink1URL=https://media.digikey.com/pdf/Data%20Sheets/Sullins%20PDFs/Female_Headers.100_DS.pdf?src-supplier=Digi-Key, ComponentLink2Description=http://www.sullinscorp.com/catalogs/78_Page80-81_HEADER_.100_2.54mm_FEMALE.pdf?src-supplier=Future+Electronics, ComponentLink2URL=http://www.sullinscorp.com/catalogs/78_Page80-81_HEADER_.100_2.54mm_FEMALE.pdf?src-supplier=Future+Electronics, Connector Type=Header,Socket, Contact Material=Bronze, Contact Plating=Tin, Height=8.5mm, Housing Material=Plastic, Lead Free="Lead Free", Length=18.3mm, Manufacturer Part Number=PPTC071LFBN-RC, Mount="Through Hole", Number of Positions=7, Number of Rows=1, Packaging=Bulk, Pitch=0.1inch, Pricing 1="1=0,59000, 10=0,51500, 80=0,42438, 440=0,36900, 1000=0,30442, 5000=0,26752, 10000=0,26650 (USD)", RoHS=Yes, Stock 1=23266, Supplier 1=Digi-Key, Termination=Solder, Width=2.5mm
J14 J26 J34: "THT Angled Pin Header WR-PHD, Pitch 2.54 mm, Dual Row, 12 pins", Contact Resistance=20mOhm, Manufacturer="Wurth Elektronik", Operating Temperature=-40to105degC, Rated Current=3A, Withstanding Voltage=500VAC, Working Voltage=250VAC, Datasheet URL=https://katalog.we-online.de/em/datasheet/6130xx21021.pdf, Gender=Male, Manufacturer URL=http://www.we-online.de, Mounting Technology=THT, Orientation=Angled, Package Reference=61301221021, Packaging=Bag, Part Number=61301221021, Pin Number=12, Pitch=2.54mm, Publisher=WurthElektronik, Row Number=Dual
J21 J22 J23 J24 J25 J33: library part PPPC041LFBN-RC, "4 Positions Embase Connecteur 0,100 po (2,54mm) Trou traversant Or", Color=Black, Manufacturer=Sullins, Package Quantity=1000, Supplier Part Number 1=S7037-ND, Category=Connectors, ComponentLink1Description=https://media.digikey.com/pdf/Data%20Sheets/Sullins%20PDFs/Female_Headers.100_DS.pdf?src-supplier=Digi-Key, ComponentLink1URL=https://media.digikey.com/pdf/Data%20Sheets/Sullins%20PDFs/Female_Headers.100_DS.pdf?src-supplier=Digi-Key, ComponentLink2Description=http://www.sullinscorp.com/catalogs/78_Page80-81_HEADER_.100_2.54mm_FEMALE.pdf?src-supplier=Future+Electronics, ComponentLink2URL=http://www.sullinscorp.com/catalogs/78_Page80-81_HEADER_.100_2.54mm_FEMALE.pdf?src-supplier=Future+Electronics, Connector Type=Header, Contact Material=Bronze, Contact Plating=Gold, Contact Type="Female Socket", Height=8.5mm, Housing Material=Plastic, Lead Free="Lead Free", Length=10.7mm, Manufacturer Part Number=PPPC041LFBN-RC, Mount="Through Hole", Number of Positions=4, Number of Rows=1, Packaging=Bulk, Pitch=0.1inch, Pricing 1="1=0,47000, 10=0,40700, 100=0,33530, 500=0,29160, 1000=0,24057, 5000=0,21141, 10000=0,21060 (USD)", RoHS=Yes, RoHS Compliant=Yes, Stock 1=100451, Supplier 1=Digi-Key, Termination=Solder, Width=2.5mm
J31: library part PPTC061LFBN-RC, "Female, 6 C, Straight, .100\"CC; 3.20mm Tail, No Mt. 100u\" Tin; PBT, Phos Bronze, 105 C", Manufacturer=Sullins, Supplier Part Number 1=S7004-ND, Category=Connectors, ComponentLink1Description=https://media.digikey.com/pdf/Data%20Sheets/Sullins%20PDFs/Female_Headers.100_DS.pdf?src-supplier=Digi-Key, ComponentLink1URL=https://media.digikey.com/pdf/Data%20Sheets/Sullins%20PDFs/Female_Headers.100_DS.pdf?src-supplier=Digi-Key, ComponentLink2Description=http://www.sullinscorp.com/catalogs/78_Page80-81_HEADER_.100_2.54mm_FEMALE.pdf?src-supplier=Future+Electronics, ComponentLink2URL=http://www.sullinscorp.com/catalogs/78_Page80-81_HEADER_.100_2.54mm_FEMALE.pdf?src-supplier=Future+Electronics, Manufacturer Part Number=PPTC061LFBN-RC, Pricing 1="1=0,52000, 10=0,44900, 80=0,37050, 440=0,32220, 1000=0,26582, 5000=0,23360, 10000=0,23270 (USD)", RoHS=Yes, Stock 1=131305, Supplier 1=Digi-Key
J32: library part 110990030, "Grove - Universal 4 pin connector [Seeed Studio] 110990030 Grove - Universal 4 pin connector", Manufacturer="Seeed Studio", Supplier Part Number 1=1597-1082-ND, Category=Connectors, ComponentLink1Description=http://www.mouser.com/ds/2/744/Seeed_316010005-786598.pdf?src-supplier=Mouser, ComponentLink1URL=http://www.mouser.com/ds/2/744/Seeed_316010005-786598.pdf?src-supplier=Mouser, ComponentLink2Description=https://statics3.seeedstudio.com/images/opl/datasheet/3470130P1.pdf?src-supplier=Digi-Key, ComponentLink2URL=https://statics3.seeedstudio.com/images/opl/datasheet/3470130P1.pdf?src-supplier=Digi-Key, Manufacturer Part Number=110990030, Pricing 1="1=1,70000 (USD)", RoHS=No, Stock 1=3588, Supplier 1=Digi-Key
Q41 Q42 Q43 Q44: "Transistor MOSFET N-Channel 30V 2.3A 3-Pin SOT-23", Manufacturer=Nexperia, Supplier Part Number 1=771-NXV55UNR, Manufacturer Part Number=NXV55UNR, Pricing 1="1=0,45000, 10=0,34400, 50=0,34400, 100=0,19500, 1000=0,09900, 10000=0,06800 (USD)", RoHS=No, Stock 1=55565, Supplier 1=Mouser
Q51 Q52: library part CMP-1048-00877-1, "Dual General Purpose Transistors, 6-Pin SOT-363, Pb-Free, Tape and Reel", Manufacturer="On Semiconductor", ComponentLink1Description="Manufacturer URL", ComponentLink1URL=http://www.onsemi.com/, ComponentLink2Description=Datasheet, ComponentLink2URL=http://www.onsemi.com/pub_link/Collateral/MBT3904DW1T1-D.PDF, ComponentLink3Description="Package Specification", ComponentLink3URL=http://www.onsemi.com/pub_link/Collateral/NTJD4001N-D.PDF, DatasheetVersion="Rev. 9", fT Min (MHz)=300, IC Continuous (A)=0.2, Mounting Technology="Surface Mount", PackageDescription="6-Pin Small Outline Transistor, Body 2 x 1.25 mm, Pitch 0.65 mm", PackageReference=SOT-363-6-419B-02_W, PackageVersion="Rev. W, 01/2006", Packing="Tape and Reel", PartNumber=MBT3904DW1T1G, Polarity="Dual NPN", RoHS=TRUE
Q53 Q54 Q55 Q56: "Single N-Channel 30 V 0.07 Ohms Surface Mount Power Mosfet - SOT-23", Case/Package=SOT-23, Continuous Drain Current (ID)=2.6A, Drain to Source Breakdown Voltage=30V, Drain to Source Resistance=70mR, Gate to Source Voltage (Vgs)=20V, Input Capacitance=225pF, Manufacturer=Vishay, Max Operating Temperature=150°C, Max Power Dissipation=750mW, Min Operating Temperature=-55°C, Package Quantity=1, Supplier Part Number 1=781-SI2304BDS-T1-E3, Threshold Voltage=1.5V, Category=MOSFETs, ComponentLink1Description=https://datasheet.ciiva.com/16225/si2304bds-16225072.pdf?src-supplier=Future+Electronics, ComponentLink1URL=https://datasheet.ciiva.com/16225/si2304bds-16225072.pdf?src-supplier=Future+Electronics, ComponentLink2Description=https://datasheet.ciiva.com/22707/1674170-22707810.pdf?src-supplier=Element14, ComponentLink2URL=https://datasheet.ciiva.com/22707/1674170-22707810.pdf?src-supplier=Element14, ComponentLink3Description=https://datasheet.ciiva.com/4439/si2304bds-107231-4439578.pdf?src-supplier=Mouser, ComponentLink3URL=https://datasheet.ciiva.com/4439/si2304bds-107231-4439578.pdf?src-supplier=Mouser, ComponentLink4Description=https://datasheet.ciiva.com/11161/si2304bds-11161450.pdf?src-supplier=Avnet, ComponentLink4URL=https://datasheet.ciiva.com/11161/si2304bds-11161450.pdf?src-supplier=Avnet, ComponentLink5Description=https://datasheet.ciiva.com/6367/si2304bds-6367035.pdf?src-supplier=Digi-Key, ComponentLink5URL=https://datasheet.ciiva.com/6367/si2304bds-6367035.pdf?src-supplier=Digi-Key, ComponentLink6Description=https://datasheet.ciiva.com/46386/1912647-46386540.pdf?src-supplier=Element14, ComponentLink6URL=https://datasheet.ciiva.com/46386/1912647-46386540.pdf?src-supplier=Element14, ComponentLink7Description=https://datasheet.ciiva.com/6367/si2304bds-6367038.pdf?src-supplier=Digi-Key, ComponentLink7URL=https://datasheet.ciiva.com/6367/si2304bds-6367038.pdf?src-supplier=Digi-Key, Drain to Source Voltage (Vdss)=30V, Element Configuration=Single, Fall Time=12.5ns, Height=1.02mm, Lead Free="Lead Free", Length=3.04mm, Manufacturer Part Number=SI2304BDST1E3, Mount="Surface Mount", Nominal Vgs=1.5V, Number of Channels=1, Number of Elements=1, Number of Pins=3, On-State Resistance=70mR, Packaging="Tape and Reel", Power Dissipation=750mW, Pricing 1="1=0,67000, 10=0,57800, 50=0,57800, 100=0,43200, 500=0,33900, 1000=0,26200, 3000=0,23800, 10000=0,23800 (USD)", Radiation Hardening=No, Rds On Max=70mR, REACH SVHC=Unknown, Rise Time=12.5ns, RoHS=Yes, Stock 1=13203, Supplier 1=Mouser, Turn-Off Delay Time=19ns, Turn-On Delay Time=7.5ns, Weight=0.050717oz, Width=1.4mm
R31 R32 R33 R34 R36 R41 R42 R43 R44 R51 R52 R53 R54 R55 R56 R57 R58 R59 R510 R511 R512 R513 R514 R515 R516 R517 R518 R519 R520 R521 R522 R523 R524 R525 R526 R527 R528: library part resistor
R35: library part 35WR50KLFTR, "35W Series 3 mm Open Frame 50 kOhm ±25 % Single-Turn Trimming Potentiometer", Insulation Resistance=100MR, Manufacturer="TT BI", Max Operating Temperature=125°C, Min Operating Temperature=-40°C, Package Quantity=2000, Power Rating=100mW, Resistance=50kR, Resistor Type=Cermet, Supplier Part Number 1=858-35WR50KLFTR, Temperature Coefficient=250ppm/°C, Tolerance=25%, Voltage Rating=50V, Category="Variable Resistors and Potentiometers", ComponentLink1Description=https://datasheet.ciiva.com/8020/4701-8020823.pdf?src-supplier=Element14, ComponentLink1URL=https://datasheet.ciiva.com/8020/4701-8020823.pdf?src-supplier=Element14, ComponentLink2Description=https://datasheet.ciiva.com/7634/4701-7634925.pdf?src-supplier=Element14, ComponentLink2URL=https://datasheet.ciiva.com/7634/4701-7634925.pdf?src-supplier=Element14, ComponentLink3Description=https://datasheet.ciiva.com/12374/35-2231-12374697.pdf?src-supplier=Mouser, ComponentLink3URL=https://datasheet.ciiva.com/12374/35-2231-12374697.pdf?src-supplier=Mouser, Lead Free="Lead Free", Manufacturer Part Number=35WR50KLFTR, Number of Turns=1, Packaging="Tape and Reel", Pricing 1="1=0,46000, 10=0,42200, 50=0,42200, 100=0,33800, 1000=0,26000, 10000=0,20200 (USD)", REACH SVHC="No SVHC", RoHS=Yes, RoHS Compliant=Yes, Stock 1=1799, Supplier 1=Mouser, Termination=SMD/SMT, Type=Potentiometer, Voltage Rating (DC)=50V, Width=1.55mm
U21 U22: library part CMP-04892-000071-1, "1-CHANNEL, 8:1 GENERAL-PURPOSE A"
U23 U24 U32: "Single Power Supply INVERTER Gate logic level shifter 5-SC70", High Level Output Current=8mA, Manufacturer="Texas Instruments", Max Operating Temperature=125°C, Min Operating Temperature=-40°C, Quiescent Current=10uA, Supplier Part Number 1=595-SN74LV1T04DCKRG4, Category="Logic Gates", ComponentLink1Description=http://www.ti.com/general/docs/suppproductinfo.tsp?distId=10&amp;gotoUrl=http%3A%2F%2Fwww.ti.com%2Flit%2Fgpn%2Fsn74lv1t04&src-supplier=Digi-Key, ComponentLink1URL=http://www.ti.com/general/docs/suppproductinfo.tsp?distId=10&amp;gotoUrl=http%3A%2F%2Fwww.ti.com%2Flit%2Fgpn%2Fsn74lv1t04&src-supplier=Digi-Key, Logic Function=Inverter, Low Level Output Current=8mA, Manufacturer Part Number=SN74LV1T04DCKRG4, Mount="Surface Mount", Number of Circuits=1, Number of Inputs=1, Packaging="Cut Tape", Pricing 1="1=0,56000, 10=0,47800, 50=0,47800, 100=0,33100, 1000=0,21700, 10000=0,19700 (USD)", Propagation Delay=7ns, RoHS=Yes, RoHS Compliant=Yes, Stock 1=13588, Supplier 1=Mouser
U31: "Automotive, 50-MHz, low-power, gain of 6-V/V stable, rail-to-rail output CMOS operational amplifier 5-SOT-23 -40 to 125", Manufacturer="Texas Instruments", Supplier Part Number 1=595-OPA607QDBVRQ1, Manufacturer Part Number=OPA607QDBVRQ1, Pricing 1="1=1,44000, 10=1,30000, 25=1,23000, 50=1,23000, 100=1,01000, 250=0,94200, 500=0,83200, 1000=0,65700, 3000=0,63500, 10000=0,63500 (USD)", RoHS=Yes, Stock 1=4836, Supplier 1=Mouser

## Free pads (board coordinates)
  round 5 hole 3: 2(157,112)

## Via types
v1: diameter 0.85, hole 0.5, Top Layer 1 to Bottom Layer 1, 18 vias
v2: diameter 0.85/0.85/0.85/0.85 (per signal layer), hole 0.5, Top Layer 1 to Bottom Layer 1, 2 vias

## Nets (pads, with @x,y where several pads share a name; then routed paths per layer and width w, separated by ;. In a path a pad name is that pad's centre, name@x,y a point inside that pad or via, vN(x,y) a via of type N, cw(c..) or ccw(c..) an arc to the next point about the centre after c; other vN are vias at no path point)
+3V3: C54.2 C510.2 J12.5 J12.7 J12.9 J12.17 J12.19 J13.3 J33.1 Q54.3 Q56.3 R31.1 R53.2 R510.2 R517.2 R524.2 U32.5 | length 23.7
  Top Layer 1 w0.254: R53.2 121.025,72 124.95,72 R517.2 ; J12.19 J12.17 ; Q54.3 144.993,91.075 Q54.3@145,91.075 ; C54.2 145.5,89.55 145,90.05 Q54.3@145,91.075 ; J12.9 J12.7 J12.5 ; C510.2 153.5,89.5 154,90 Q56.3 153.95,91.05 145.025,91.05 Q54.3@145,91.075
+3V3_NFC: C511.2 J31.1 Q56.2 | length 5.8
  Top Layer 1 w0.254: Q56.2 156.018,92 157,92 158.5,90.5 C511.2
+3V3_US: C55.2 Q54.2 U24.5 | length 3.7
  Top Layer 1 w0.254: v1(141.5,90) 141.575,90.075 142.993,90.075 143,90.068 C55.2
  other v1: 132.5,50
+5V: C51.2 C57.2 J12.2 J12.4 J12.6 J32.2 Q53.3 Q55.3 R41.2 R42.2 R43.2 R44.2 U31.5 | length 30.9
  Top Layer 1 w0.254: Q53.3 Q53.3@118.5,91 ; C51.2 119,89.5 118.5,90 Q53.3@118.5,91 ; C57.2@127,88 127,89.5 127.5,90 Q55.3 Q53.3@118.5,91 ; J12.6 J12.4 J12.2 ; R42.2 129.525,114.475 R41.2 R43.2 131.95,114.475 R44.2 R42.2
+5V_US: C21.2 C22.2 C52.2 J21.1 J22.1 J23.1 J24.1 J25.1 Q53.2 U21.16 U22.16 U23.5 | length 13.9
  Top Layer 1 w0.254: v1(115.05,90.05) Q53.2 C52.2 ; v2(123,42.5) 123,44.4 123.125,44.525 U22.16 ; v2(123,55.5) 123,57.326 C21.2 123.05,57.624 123.05,59.651 U21.16 ; v1(132.5,58) 132.5,59.627 132.573,59.7 U23.5
+12V: J01.1 J12.14 J12.16 J12.18 R33.2 R52.1 R59.1 R516.1 R523.1 | length 8.6
  Top Layer 1 w0.254: R52.1 R516.1 ; J12.18 J12.16 J12.14 ; R59.1 150.975,88.05 R523.1
BALISE_I2C_SCL: J33.4 J34.11 | length 10.6
  Top Layer 1 w0.254: J33.4 162.62,34 J34.11
BALISE_I2C_SDA: J33.3 J34.12 | length 11.4
  Top Layer 1 w0.254: J33.3 156.04,35.381 159.309,38.65 J34.12
BAT_CHARGING: J14.8 Q43.1 | length 30.2
  Top Layer 1 w0.254: Q43.1 142.01,113.5 145.5,113.5 163.27,95.73 J14.8
BAT_NEED_CHARGE: J14.7 Q44.1 U32.4 | length 38.9
  Top Layer 1 w0.254: Q44.1 146.583,109.6 156.383,99.8 ; U32.4 156.383,99.8 ; J14.7 166.089,94.549 161.634,94.549 156.383,99.8
GND: C11.1 C12.1 C13.1 C21.1 C22.1 C53.1 C56.1 C59.1 C512.1 J01.2 J01.3 J11.5 J11.7 J11.10 J11.12 J11.13 J11.15 J11.18 J11.20 J12.1 J12.3 J12.8 J12.10 J12.11 J12.12 J12.13 J12.15 J12.20 J13.2 J13.6 J14.3 J14.4 J21.4 J22.4 J23.4 J24.4 J25.4 J26.3 J26.4 J31.2 J31.6 J32.1 J33.2 J34.3 J34.4 pad.2 Q41.2 Q42.2 Q43.2 Q44.2 R34.1 R36.2 R56.1 R57.1 R513.1 R514.1 R520.1 R521.1 R527.1 R528.1 U21.6 U21.8 U22.6 U22.8 U23.3 U24.3 U31.2 U32.3 | length 100.2
  Top Layer 1 w0.254: J13.2 108.29,99.46 109.08,100.25 C13.1 ; R57.1 113.025,76.5 115.975,76.5 R56.1 116.199,76.674 C53.1 ; J11.20 J11.18 J11.15 J11.13 J11.12 J11.10 J11.7 J11.5 ; C21.1@125,57.326 C21.1 C21.1@125,57.5 ; C59.1 127.674,76.475 R520.1 130.025,76.45 R521.1 ; U22.6 128.907,50.007 129.826,50.007 130.209,50.39 130.209,50.86 129.826,51.243 128.907,51.243 U22.8 ; U21.6 128.907,63.007 129.826,63.007 130.209,63.39 130.209,63.86 129.826,64.243 128.907,64.243 U21.8 ; R514.1 144.301,76.975 C56.1 ; J12.15 J12.13 J12.11 J12.12 J12.10 J12.8 ; C512.1 154.699,76.975 R527.1 R528.1 ; J12.3 J12.1 157.04,122.5 161.5,122.5 162.7,121.3 J01.2 168.2,121.3 169.05,120.45 J01.3 169.05,102.59 J14.3 J14.4 ; J26.4 J26.3 ; J34.4 J34.3
GSM_PWR_5VIN: C11.2 C12.2 C13.2 C58.2 J13.1 Q55.2 | length 15.6
  Top Layer 1 w0.254: J13.1 111.325,102 C11.2 C12.2 ; C12.2@115.099,101.8 115.299,102 117.25,102 C13.2 ; Q55.2 130.55,91.95 132,90.5 C58.2
GSM_RST: J13.7 J14.11 | length 69
  Top Layer 1 w0.254: J13.7 108.2,86.76 110,88.56 110,90 115.5,95.5 156.5,95.5 164,88 166.5,88 167.27,88.77 J14.11
GSM_UART_RXD: J13.5 J14.12 | length 61.1
  Top Layer 1 w0.254: J13.5 112.66,96.5 157,96.5 162.85,90.65 J14.12
GSM_UART_TXD: J13.4 J14.10 | length 60.2
  Top Layer 1 w0.254: J13.4 111.62,98 156.5,98 161.31,93.19 J14.10
HOLO_LED_DEBUG: J11.16 Q42.1 | length 11.8
  Top Layer 1 w0.254: Q42.1 118.55,111.45 117.5,112.5 117.5,116.31 J11.16
HOLO_LED_PWR: J11.14 Q41.1 | length 6.2
  Top Layer 1 w0.254: Q41.1 119.835,115.5 122.69,118.355 J11.14
HOLO_UART_RX: J11.1 J14.5 | length 47.9
  Top Layer 1 w0.254: J11.1 130.741,121.931 138.569,121.931 163.411,97.089 166.089,97.089 J14.5
HOLO_UART_TX: J11.3 J14.6 | length 47.1
  Top Layer 1 w0.254: J11.3 129.18,121.64 129.18,121.858 130.822,123.5 138,123.5 163.23,98.27 J14.6
IMU_I2C_SCL: J32.4 J34.8 | length 41.4
  Top Layer 1 w0.254: J32.4 129.268,35.768 138.854,45.354 163.106,45.354 J34.8
IMU_I2C_SDA: J32.3 J34.6 | length 43.1
  Top Layer 1 w0.254: J32.3 127.268,35.881 137.657,46.27 J34.6
NetC51_1: C51.1 C52.1 Q51.6 R51.1 R52.2 | length 13.8
  Top Layer 1 w0.254: R51.1 114.373,86.348 C52.1 C51.1 119,85.364 121.414,82.95 122.3,82.95 122.35,83 122.35,83.814 121.5,84.664 R52.2
NetC53_2: C53.2 Q51.2 R55.2 R56.2 | length 11.1
  Top Layer 1 w0.254: R56.2 118.4,78.525 C53.2@118.5,78.525 ; R55.2 118.699,78.525 C53.2 C53.2@118.5,78.525 ; Q51.2 123,80.5 122.227,79.727 119.827,79.727 118.625,78.525 C53.2@118.5,78.525
NetC54_1: C54.1 C55.1 Q52.6 R58.1 R59.2 | length 10.6
  Top Layer 1 w0.254: R58.1 140.675,86.2 142.65,86.2 142.756,86.306 142.919,86.306 C55.1 C54.1 147.776,86.224 R59.2 148,85 148.85,84.15 Q52.6
NetC56_2: C56.2 Q52.2 R512.2 R513.2 | length 9.8
  Top Layer 1 w0.254: R513.2 144.326,79 C56.2 144.699,79.025 R512.2 147.5,80 148,80.5 149.351,80.5 149.5,80.649 Q52.2
NetC57_1: C57.1 C58.1 Q51.3 R515.1 R516.2 | length 17.3
  Top Layer 1 w0.254: v1@123.233,79.233 123.65,79.65 Q51.3 ; v1(124.5,84) R516.2 126.801,85.975 C57.1 129.301,86.174 R515.1 129.699,86.174 C58.1
  Bottom Layer 1 w0.254: v1(123,79) 124.499,80.499 124.499,83.999 v1(124.5,84)
NetC59_2: C59.2 Q51.5 R519.2 R520.2 | length 10.7
  Top Layer 1 w0.254: Q51.5 123.015,82.935 123.015,82.485 123.5,82 123.95,82 125,80.95 R519.2 127.301,78.5 C59.2 127.724,78.525 R520.2
NetC510_1: C510.1 C511.1 Q52.3 R522.1 R523.2 | length 17
  Top Layer 1 w0.254: v1(149.5,79.5) 150.15,80.15 Q52.3 ; v1(151,84.5) R523.2 151.199,86.174 C510.1 C511.1
  Bottom Layer 1 w0.254: v1(149.5,79.5) 151,81 v1(151,84.5)
NetC512_2: C512.2 Q52.5 R526.2 R527.2 | length 7.2
  Top Layer 1 w0.254: Q52.5 149.5,82.819 150.163,82.156 150.497,82.156 151.5,81.153 R526.2 ; R526.2 151.35,79.025 150.852,79.523 151.002,79.523 R526.2
NetD1_1: D1.1 Q41.3 | length 2.3
  Top Layer 1 w0.254: Q41.3 123.7,114.55 D1.1
NetD1_2: D1.2 R41.1 | length 2.2
  Top Layer 1 w0.254: D1.2 R41.1
NetD2_1: D2.1 Q42.3 | length 2.5
  Top Layer 1 w0.254: Q42.3 121.55,110.45 123.95,110.45 D2.1
NetD2_2: D2.2 R42.1 | length 2
  Top Layer 1 w0.254: D2.2 R42.1
NetD3_1: D3.1 Q43.3 | length 2.5
  Top Layer 1 w0.254: D3.1 Q43.3
NetD3_2: D3.2 R43.1 | length 2
  Top Layer 1 w0.254: R43.1 D3.2
NetD4_1: D4.1 Q44.3 | length 2.6
  Top Layer 1 w0.254: D4.1 137.55,110.55 Q44.3
NetD4_2: D4.2 R44.1 | length 2
  Top Layer 1 w0.254: R44.1 D4.2
NetQ51_1: Q51.1 R57.2 | length 10.4
  Top Layer 1 w0.254: R57.2 114.097,78.525 116.622,81.05 Q51.1
NetQ51_4: Q51.4 R521.2 | length 11.8
  Top Layer 1 w0.254: Q51.4 129.556,82.95 133,79.506 R521.2
NetQ52_1: Q52.1 R514.2 | length 12.1
  Top Layer 1 w0.254: R514.2 139,81 139.5,81.5 148.8,81.5 Q52.1
NetQ52_4: Q52.4 R528.2 | length 11.7
  Top Layer 1 w0.254: Q52.4 Q52.4 155.425,83.45 159.85,79.025 R528.2
NetQ53_1: Q53.1 R51.2 | length 5.7
  Top Layer 1 w0.254: R51.2@113.9,88.125 R51.2 114,90.5 115.45,91.95 Q53.1
NetQ54_1: Q54.1 R58.2 | length 5.9
  Top Layer 1 w0.254: R58.2 140.5,91.05 141.5,92.05 142.982,92.05 Q54.1@143.032,92
NetQ55_1: Q55.1 R515.2 | length 2.1
  Top Layer 1 w0.254: Q55.1@129.436,90.1 Q55.1@129.486,90.05 ; Q55.1 129.468,88.057 R515.2
NetQ56_1: Q56.1 R522.2 | length 2
  Top Layer 1 w0.254: Q56.1 155.968,88.057 R522.2
NetR31_2: R31.2 R32.1 U31.3 | length 5.8
  Top Layer 1 w0.254: U31.3 141.475,101.95 R32.1 R31.2
NetR32_2: R32.2 R36.1 U31.1 U32.2 | length 9.7
  Top Layer 1 w0.254: U31.1 141.375,100.05 R32.2 R36.1 144.525,99.95 145.897,99.95 146.397,100.45 U32.2
NetR33_1: R33.1 R35.2 | length 2.6